# Altium PCB GPSDO_V2.0.PcbDoc (part 3 of 3)
Units mil, origin at the board's own origin, x right, y up, seen from the top; angles counter-clockwise.
Board outline 3461 x 3930 mil, 2 copper layers (Top Layer, Bottom Layer); 97 components, 56 nets, 415 pads, 225 vias.
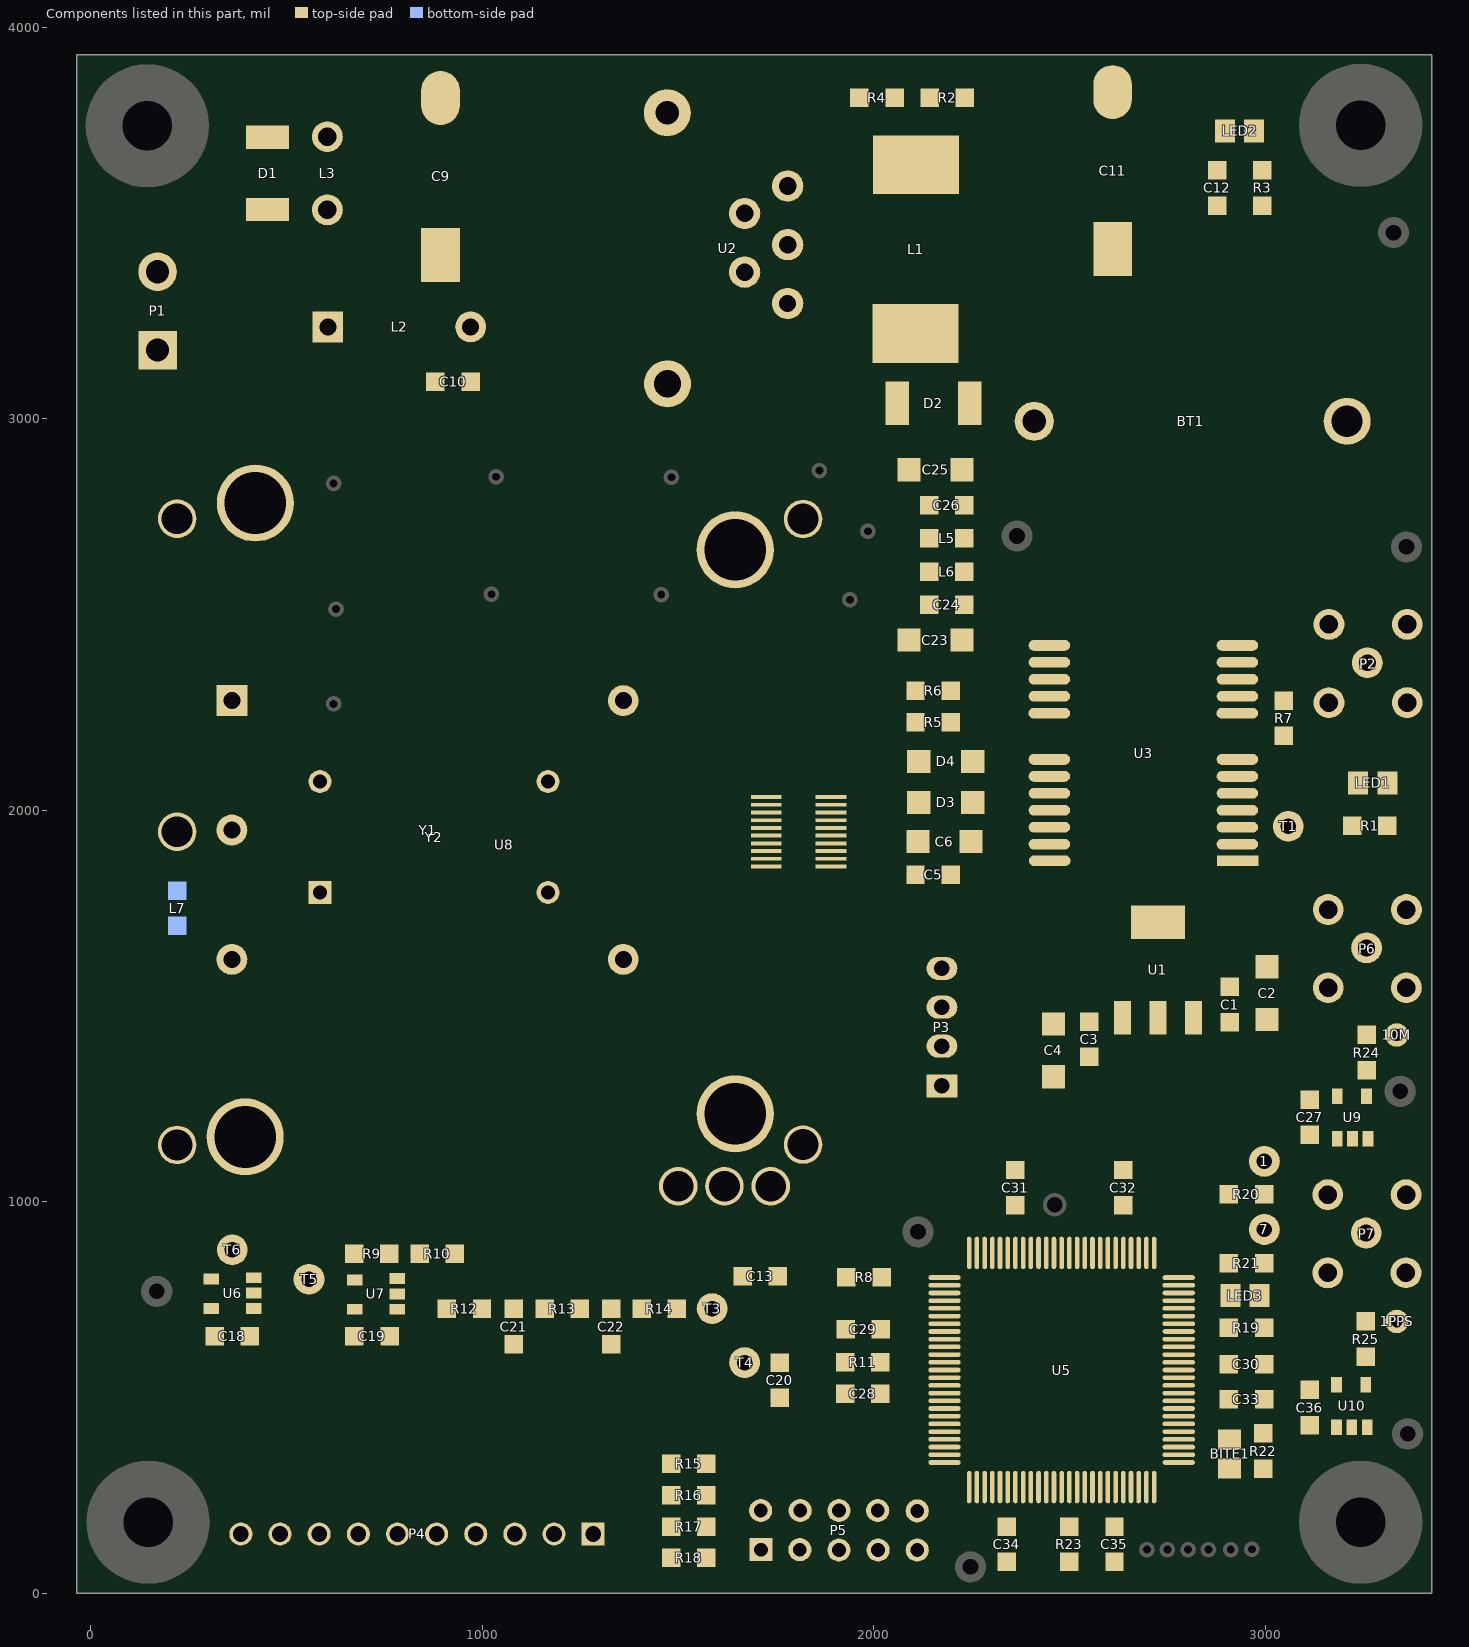
[diagram p3: the components of this part, seen from the top]

## Other copper (continued)
Bottom Layer:
  rectangle net GND: 3131,1814 3388,2060
  rectangle net GND: 3105,2106 3394.5,2209
  rectangle net GND: 226,1312 592,1545
  rectangle net GND: 1289,2100 1430,2223
  rectangle net GND: 1288,2336 1433,2468
  rectangle net GND: 1469,655 1498,858
  region net GND: 2642,358 2647,363 3319.5,363 3394.5,438 3399,433.5 3399,71 3023,71 3021,69 3018,72 3018,170 2629,170 2628,169 2622,175 2622,355
  region net GND: 2234,359 2235,358 2642,358 2642,40 2648,34 2190,34 2190,86 2217,113 2147,183 2147,195 2164,212 2166,210 2212,210 2212,337
  region net GND: 133,879 256,879 258,881 367,772 367,581 439,509 439,502 522,502 637,617 637,849 581,905 575,905 575,925 585,935 592,928 962,928 962,678 573,289 573,281 536,281 144,673
  region net GND: 1197,929 1200,926 1302,926 1302,648 1303,647 1191,647
  region net GND: 11,553 279,285 281,285 281,48.5 289,40.5 273.5,25 0,25 0,523 -14,537
  region net GND: 2866,783 2869,780 2995,780 2995,508 2975,488 2585,488
  region net GND: 3184,1373 3396,1373 3383,1360 3383,1136 3373,1136 3184,1325
  region net GND: 2524,2823 3291,2823 3296,2818 3284,2806 3284,2585 3137,2585 3094,2542 3072,2542 3072,2095 3052,2075 2972,2075 2972,1606 2615,1249 2278,1249 2371,1342 2371,2145 2416,2190 2416,2369 2504,2457 2504,2486
  region net GND: 621,2610 743,2488 1045,2488 1068,2465 1068,2028 1158,1938 1121,1901 1121,1741 1106,1726 1144,1688 1231,1688 1231,1107 1248,1090 1236,1078 583,1078 583,1601 697,1715 697,2111 618,2190 618,2202
  region net GND: 618,2841 621,2844 1467,2844 1467,2519 1449,2501 760,2501 634,2627
  region net GND: 1126,2472 1296,2472 1298,2470 1298,2039 1125,2212
  region net GND: 1955,2708 1955,1700 1946,1709 1438,1709 1405,1742 1405,1932 1356,1981 1356,2190 1369,2203 1370,2202 1421,2202 1421,2476 1450,2505 1752,2505
  region net GND: 1426,1721 1957,1721 1949,1713 1949,1201 1900,1201 1867,1234 1867,1245 1823,1245 1817,1251 1817,1314 1762,1369 1756,1363 1573,1363 1573,1355 1408,1190 1408,1527 1426,1545
  region net GND: 1936,1195 1960,1171 1996,1171 1996,1131 2172,955 2172,869 2007,869 1967,909 1789,909 1907,1027 1907,1062
  region net GND: 1778,862 1777,861 1777,773 2404,773 2412,765 2302,655 1616,655 1669.37,708.37 1669.37,792.63 1665,797
  region net GND: 1600,3898 3394.5,3898 3394,3897.5 3394,3114 3135,3114 3086,3065 3086,2938 3084,2940 2642,2940 2470,3112 2347,3112 2347,3094 2219,2966 1717,2966 1890,3139 1890,3706 1761,3706 1752,3715 1679,3642 1622,3642 1617,3647
  region net GND: 1621,3755 1544,3678 1367,3678 1367,3327 1363,3323 1366,3320 1542,3320 1583,3361 1583,3585 1627,3629 1621,3635
  region net GND: 903,3151 1216,3151 1216,3146 1364,2998 910,2998
  region net GND: 526,3902 1414,3902 1418,3898 1360,3840 1360,3326 1363,3323 1359,3319 953,3319 953,3314 906,3267 906,2990 504,2990 498,2996 508,3006 508,3135 647,3135 649,3133 693,3177 693,3766 649,3810 531,3810 530,3811
  region net GND: 129,3060 255,3060 263,3068 366,2965 366,2946 270,2946 268,2948 141,2821 134,2821
  region net GND: 262,3476 530,3476 530,3141 538,3133 522,3117 522,2968 363,2968 263,3068 263,3110
  region net GND: -5.5,3899.5 0,3894 550,3894 550,3496 530,3476 95,3476 2,3383

## Silkscreen, mask and mechanical layers (free items; w line width, h text height)
Top Overlay:
  text "12V" at 399,3455 h80 r270
  text "GND" at 3153,3454 h60
  text "GND" at 399,3249 h80 r270
  text "5V" at 2423,2682 h60
  text "GPS-ANT" at 3164,2553 h60
  text "1PPS" at 3000,1862 h60
  text "10M" at 3306,1822 h60
  text "GND" at 2334,1578 h60
  text "TX" at 2333,1479 h60
  text "RX" at 2333,1373 h60
  text "3.3V" at 2336,1221 h60
  text "40K" at 2946,1163 h60
  text "1PPS" at 3276,1092 h60
  text "3.3V" at 2431,1037 h60
  text "GND" at 2079,1007 h60
  text "1PPS" at 2810,912 h60
  text "FR-C" at 122.25,858 h60
  text "GND" at -2,753 h60
  text "PWM" at 1649,712 h60
  text "GND" at 3299,460 h60
  text "GPSDO-V2.0" at -17,446 h100
  text "GPS-RX" at 715,312 h60 r90
  text "12V" at 494,311 h60 r90
  text "GPS-RX" at 605,311 h60 r90
  text "40K" at 913,311 h60 r90
  text "TOD-TX" at 1119,311 h60 r90
  text "10M" at 806,310 h60 r90
  text "1PPS" at 1012,310 h60 r90
  text "12V" at 395,308 h60 r90
  text "GND" at 1303,305 h60 r90
  text "GND" at 1205,304 h60 r90
  text "GND" at 2190,129 h60
Top Solder:
  rectangle: 2598,1581 2860,1760

## Text inside footprints (layer, text, board x,y; h text height)
BT1: Top Overlay "+" at 2481,2970 h30
C9: Top Overlay "+" at 803,3352 h30
C11: Top Overlay "+" at 2520,3367 h30
U8: Top Overlay "1" at 1674.7,2041.1 h30 r90; Top Overlay "19" at 1674.7,1863.3 h30 r90; Top Overlay "2" at 1971.3,2044.9 h30 r90; Top Overlay "20" at 1971.3,1864.3 h30 r90; Bottom Overlay "4-GND" at 1918.9,1226.4 h40 r90; Bottom Overlay "1-Vcon" at 151.9,2881.9 h40 r90; Bottom Overlay "2-CASE GND" at 154.4,2095.7 h40 r90; Bottom Overlay "3-RFout" at 154.4,1275.4 h40 r90; Bottom Overlay "5-VCC" at 1926.8,2829.7 h40 r90; Bottom Overlay "6-BITE" at 1511,1452 h40 r90; Bottom Overlay "7-232TX" at 1433,1456 h40 r90; Bottom Overlay "8-232RX" at 1355,1458 h40 r90
Y1: Top Overlay "RFOUT" at 1131,1598 h40; Top Overlay "GND" at 1198,2255 h40; Top Overlay "VCC" at 417,1598 h40; Top Overlay "RV/NC" at 428,1932 h40; Top Overlay "CV/NC" at 428,2266 h40
Y2: Top Overlay "GND" at 1022,1767 h40; Top Overlay "RFout" at 983,2055 h40; Top Overlay "VCC" at 632,2054 h40; Top Overlay "Vcon/NC" at 636,1778 h40